# EAGLE board raf1-rev3 (EAGLE 7.1.0)
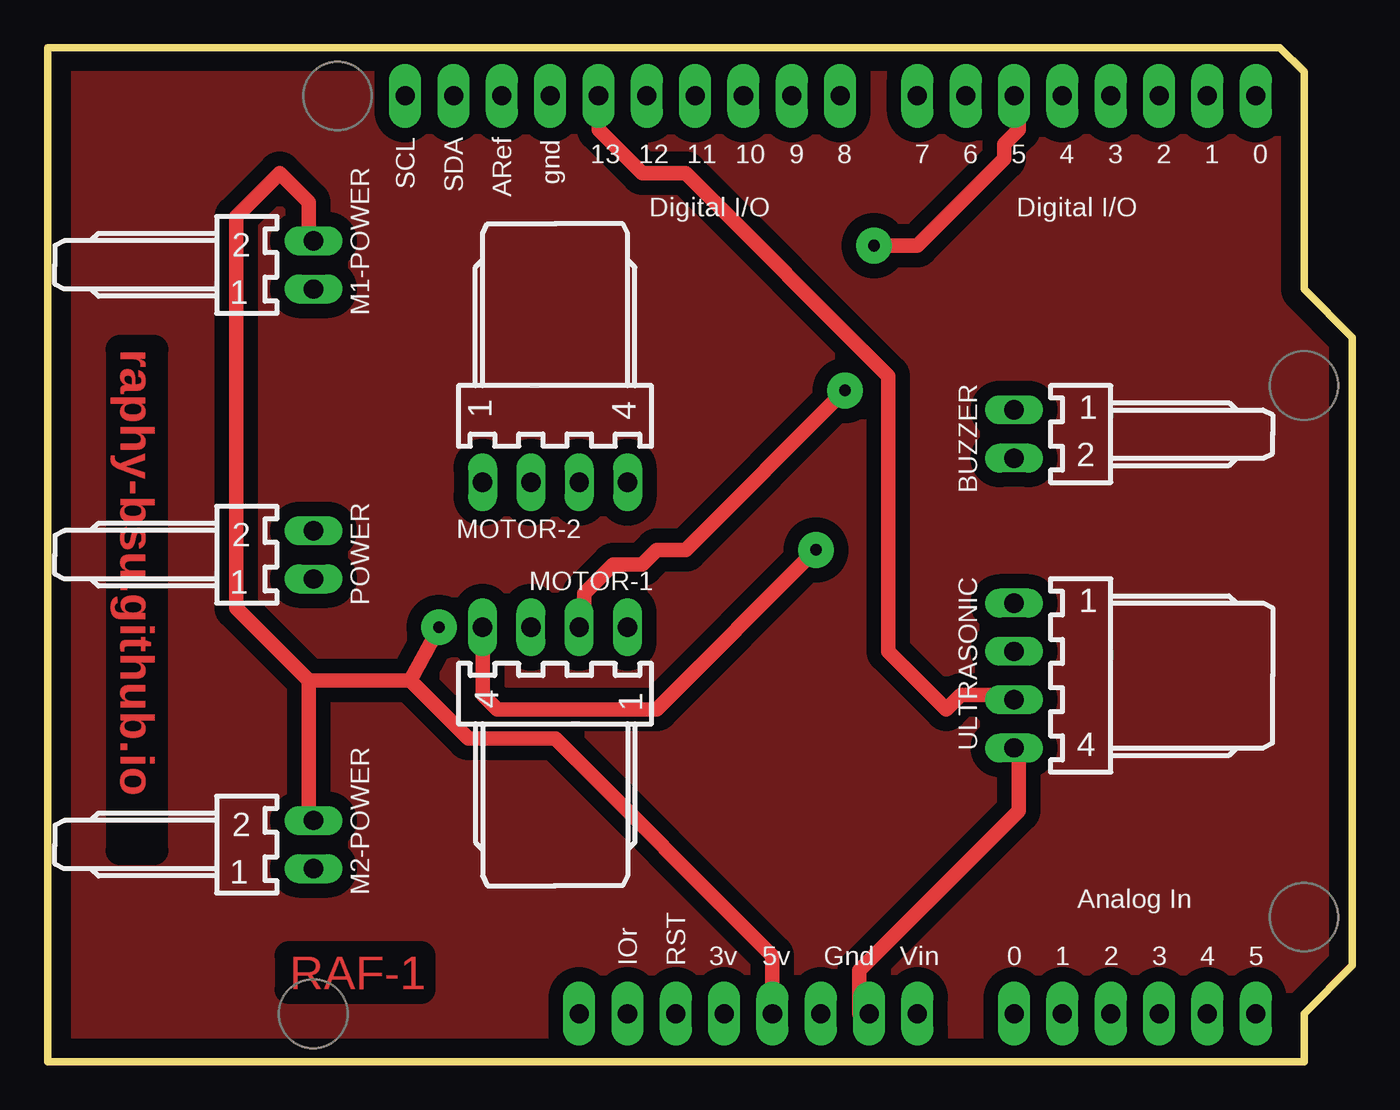
[diagram p0: board, top side]
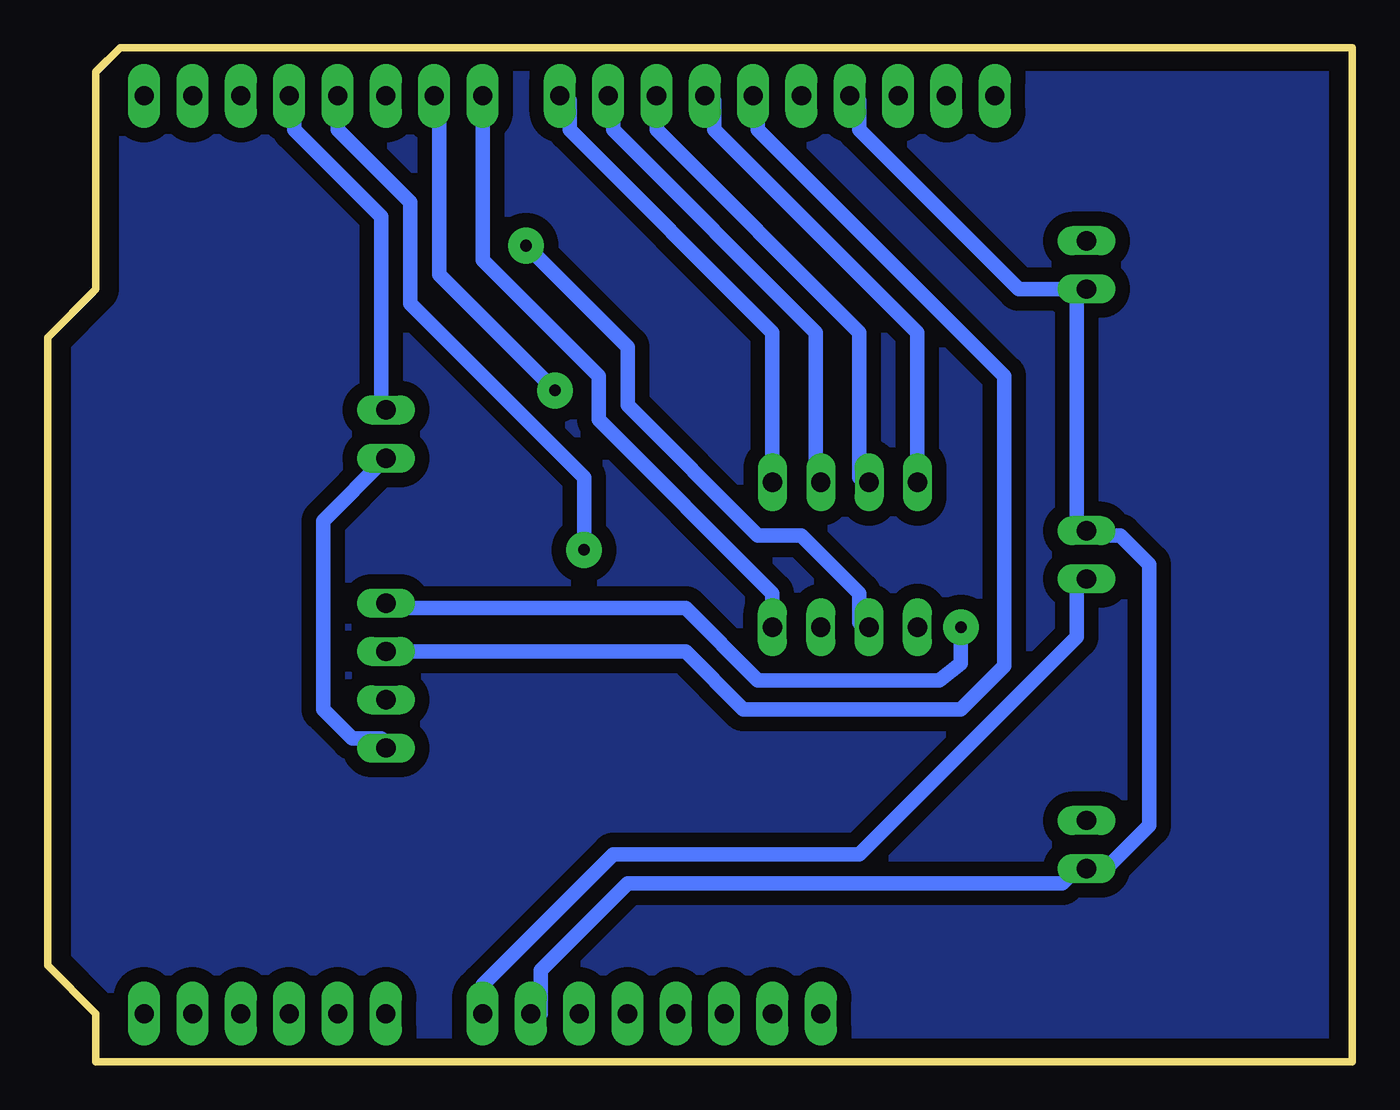
[diagram p1: board, bottom side, seen from below]

Size 68.58 x 53.34 mm. Coordinates in mm from the lower left corner, seen from the top.
Outline: 0,53.34 64.77,53.34 66.04,52.07 66.04,40.64 68.58,38.1 68.58,5.08 66.04,2.54 66.04,0 0,0 0,53.34
Copper layers (1*16): Top 0.035mm / dielectric 1.5mm / Bottom 0.035mm
Design rules "default *": minimum track width 10mil, minimum drill 24mil, track to track 8mil, track to pad 8mil, pad to pad 8mil, via to via 8mil, smd to smd 8mil, copper to edge 40mil, drill to drill 8mil, minimum pad ring 10mil, minimum via ring 25mil, stop-mask expansion 4mil, vias tented up to drill 0mil, thermal gap 10mil
Net classes: 0 default: width 0.762 mm, drill 0.508 mm, clearance 0.762 mm

## Footprints (pad centres in the part's own frame; a part is rotated, then mirrored left to right if it is on the bottom)
7395-02 = drill 1.016 long: 1 1.27,0; 2 -1.27,0
7395-04 = drill 1.016 long: 1 3.81,0; 2 1.27,0; 3 -1.27,0; 4 -3.81,0
ARDUINOR3-BPLACE = drill 1 pad 1.676 long: 3V 35.56,2.54; 5V 38.1,2.54; A0 50.8,2.54; A1 53.34,2.54; A2 55.88,2.54; A3 58.42,2.54; A4 60.96,2.54; A5 63.5,2.54; AREF 23.876,50.8; D0 63.5,50.8; D1 60.96,50.8; D2 58.42,50.8; D3 55.88,50.8; D4 53.34,50.8; D5 50.8,50.8; D6 48.26,50.8; D7 45.72,50.8; D8 41.656,50.8; D9 39.116,50.8; D10 36.576,50.8; D11 34.036,50.8; D12 31.496,50.8; D13 28.956,50.8; GND 26.416,50.8; GND1 43.18,2.54; GND2 40.64,2.54; IOREF 30.48,2.54; RESERVED 27.94,2.54; RESET 33.02,2.54; SCL 18.796,50.8; SDA 21.336,50.8; VIN 45.72,2.54

## Placement (x,y rotation side)
BUZZER  22-05-7028-02  [7395-02]  50.8,33.02 90 top
M1-POWER  22-05-7028-02  [7395-02]  13.97,41.91 270 top
M2-POWER  22-05-7028-02  [7395-02]  13.97,11.43 270 top
MOTOR-1  22-05-7048-04  [7395-04]  26.67,22.86 0 top
MOTOR-2  22-05-7048-04  [7395-04]  26.67,30.48 180 top
POWER  22-05-7028-02  [7395-02]  13.97,26.67 270 top
U1  ARDUINOR3-BPLACE  [ARDUINOR3-BPLACE]  0,0 0 top
ULTRASONIC  22-05-7048-04  [7395-04]  50.8,20.32 90 top

## Library data of the parts
BUZZER M1-POWER M2-POWER MOTOR-1 MOTOR-2 POWER ULTRASONIC = con-molex
U1 = adafruit

## Nets
3V: U1.3V
5V: M1-POWER.2 M2-POWER.2 U1.5V
BZR: BUZZER.1 U1.D3
ECHO: U1.D13 ULTRASONIC.3
GND: BUZZER.2 M1-POWER.1 M2-POWER.1 POWER.2 U1.GND U1.GND1 ULTRASONIC.4
GND2: U1.GND2
MOTOR1-1: MOTOR-1.1 U1.D7
MOTOR1-2: MOTOR-1.2 U1.D6
MOTOR1-3: MOTOR-1.3 U1.D5
MOTOR1-4: MOTOR-1.4 U1.D4
MOTOR2-1: MOTOR-2.1 U1.D11
MOTOR2-2: MOTOR-2.2 U1.D10
MOTOR2-3: MOTOR-2.3 U1.D9
MOTOR2-4: MOTOR-2.4 U1.D8
N$2: ULTRASONIC.1
TRIG: U1.D12 ULTRASONIC.2
VCC: POWER.1 U1.VIN

## Tracks (layer width: path | path; a pad name or v marks a point on that pad's centre or on a via)
5V  (via drill 0.61)
  Top 0.762: 13.72,20.07 13.72,13.21 M2-POWER.2 | 13.72,20.07 9.91,23.88 9.91,44.45 12.19,46.74 13.72,45.21 13.72,43.69 M1-POWER.2 | 19.05,20.07 v20.57,22.86 | 13.72,20.07 19.05,20.07 | U1.5V 38.1,5.59 26.67,17.02 22.1,17.02 19.05,20.07
BZR
  Bottom 0.762: BUZZER.1 51.05,34.54 51.05,44.45 55.63,49.02 55.63,50.55 U1.D3
ECHO
  Top 0.762: U1.D13 28.96,49.02 31.24,46.74 33.53,46.74 44.2,36.07 44.2,21.59 47.24,18.54 48.01,19.3 50.29,19.3 ULTRASONIC.3
GND
  Top 0.762: ULTRASONIC.4 51.05,16.26 51.05,13.21 42.67,4.83 42.67,2.54 U1.GND1
  Bottom 0.762: BUZZER.2 54.1,28.45 54.1,18.54 52.58,17.02 51.05,17.02 ULTRASONIC.4 | 14.48,40.64 14.48,28.45 POWER.2 13.72,27.69 12.19,27.69 10.67,26.16 10.67,12.45 12.95,10.16 M2-POWER.1 14.48,10.16 15.24,9.4 38.1,9.4 42.67,4.83 42.67,2.54 U1.GND1 | 14.48,40.64 17.53,40.64 25.91,49.02 25.91,50.55 U1.GND | 14.48,40.64 M1-POWER.1
MOTOR1-1
  Bottom 0.762: MOTOR-1.1 30.48,24.64 39.62,33.78 39.62,36.07 45.72,42.16 U1.D7
MOTOR1-2  (via drill 0.61)
  Top 0.762: v41.91,35.31 33.53,26.92 32,26.92 31.24,26.16 29.72,26.16 28.19,24.64 28.19,23.11 MOTOR-1.2
  Bottom 0.762: v41.91,35.31 48.01,41.4 48.01,50.55 U1.D6
MOTOR1-3  (via drill 0.61)
  Top 0.762: v43.43,42.93 45.72,42.93 50.29,47.5 50.29,48.26 51.05,49.02 51.05,50.55 U1.D5
  Bottom 0.762: v43.43,42.93 38.1,37.59 38.1,34.54 31.24,27.69 28.96,27.69 25.91,24.64 25.91,23.11 MOTOR-1.3
MOTOR1-4  (via drill 0.61)
  Top 0.762: MOTOR-1.4 22.86,19.3 23.62,18.54 32,18.54 v40.39,26.92
  Bottom 0.762: v40.39,26.92 40.39,30.73 49.53,39.88 49.53,45.21 53.34,49.02 U1.D4
MOTOR2-1
  Bottom 0.762: MOTOR-2.1 22.86,38.35 33.53,49.02 33.53,50.55 U1.D11
MOTOR2-2
  Bottom 0.762: U1.D10 36.58,49.02 25.91,38.35 25.91,30.73 MOTOR-2.2
MOTOR2-3
  Bottom 0.762: MOTOR-2.3 28.19,30.73 28.19,38.35 38.86,49.02 38.86,50.55 U1.D9
MOTOR2-4
  Bottom 0.762: MOTOR-2.4 30.48,38.35 41.15,49.02 41.15,50.55 U1.D8
N$1
  pour Top: 0,53.34 64.77,53.34 66.04,52.07 66.04,40.64 68.58,38.1 68.58,5.08 66.04,2.54 66.04,0 0,0
N$2
  Bottom 0.762: ULTRASONIC.1 50.29,23.88 35.05,23.88 31.24,20.07 21.78,20.07
N$3
  Bottom 0.762: 21.72,20.07 20.57,20.96 20.57,22.86
N$5
  pour Bottom (no thermals): 0,53.34 64.77,53.34 66.04,52.07 66.04,40.64 68.58,38.1 68.58,5.08 66.04,2.54 66.04,0 0,0
TRIG
  Bottom 0.762: ULTRASONIC.2 35.05,21.59 32,18.54 20.57,18.54 18.29,20.83 18.29,36.07 31.24,49.02 31.24,50.55 U1.D12
VCC
  Bottom 0.762: U1.VIN 45.72,4.06 38.86,10.92 25.91,10.92 14.48,22.35 14.48,25.4 POWER.1

## Text on the board
Top: raphy-bsu.github.io | RAF-1